# EAGLE board usbjtag (EAGLE 7.2.0)
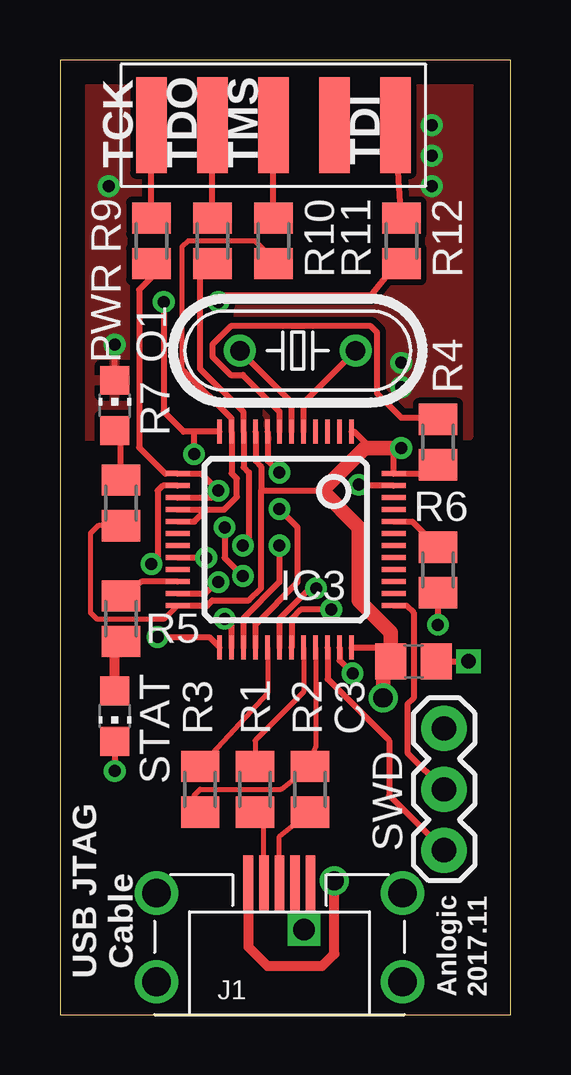
[diagram p0: board, top side]
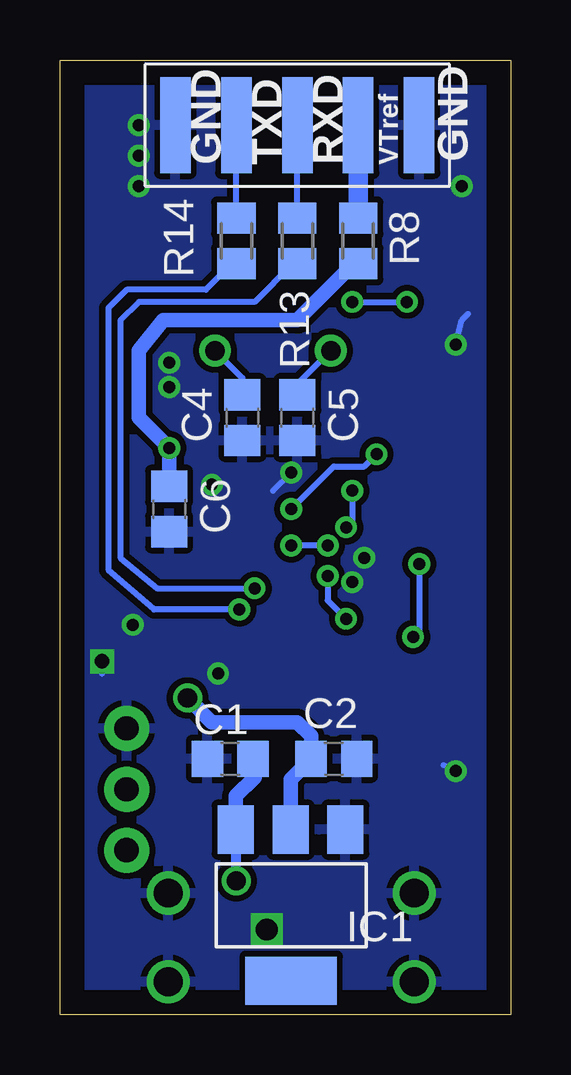
[diagram p1: board, bottom side, seen from below]

Size 18.78 x 39.8 mm. Coordinates in mm from the lower left corner, seen from the top.
Outline: 0,0 18.78,0 18.78,39.8 0,39.8 0,0
Copper layers (1*16): Top 0.035mm / dielectric 1.5mm / Bottom 0.035mm
Design rules "default": minimum track width 10mil, minimum drill 24mil, track to track 8mil, track to pad 8mil, pad to pad 8mil, via to via 8mil, smd to smd 8mil, copper to edge 40mil, drill to drill 8mil, minimum pad ring 10mil, minimum via ring 8mil, stop-mask expansion 4mil, vias tented up to drill 0mil, thermal gap 10mil
Net classes: 0 default: width 0.254 mm, clearance 0.254 mm; 2 gnd: width 0.305 mm, drill 0.559 mm, clearance 0.254 mm; 3 usbvcc: width 0.508 mm, drill 0.61 mm, clearance 0.254 mm

## Footprints (pad centres in the part's own frame; a part is rotated, then mirrored left to right if it is on the bottom)
C0805 = smd 1.3 x 1.5: 1 -0.95,0; 2 0.95,0
SIDESMT = smd 1.27 x 4: 1 -5.08,0; 2 -2.54,0; 3 0,0; 4 2.54,0; 5 5.08,0
SOT223 = smd 1.499 x 2.007: 1 -2.261,-3.15; 2 0.025,-3.15; 3 2.311,-3.15 | smd 3.81 x 2.007: 4 0,3.15
TQFP48 = smd 0.2 x 1: 1 -2.75,-4.5; 2 -2.25,-4.5; 3 -1.75,-4.5; 4 -1.25,-4.5; 5 -0.75,-4.5; 6 -0.25,-4.5; 7 0.25,-4.5; 8 0.75,-4.5; 9 1.25,-4.5; 10 1.75,-4.5; 11 2.25,-4.5; 12 2.75,-4.5; 25 2.75,4.5; 26 2.25,4.5; 27 1.75,4.5; 28 1.25,4.5; 29 0.75,4.5; 30 0.25,4.5; 31 -0.25,4.5; 32 -0.75,4.5; 33 -1.25,4.5; 34 -1.75,4.5; 35 -2.25,4.5; 36 -2.75,4.5 | smd 1 x 0.2: 13 4.5,-2.75; 14 4.5,-2.25; 15 4.5,-1.75; 16 4.5,-1.25; 17 4.5,-0.75; 18 4.5,-0.25; 19 4.5,0.25; 20 4.5,0.75; 21 4.5,1.25; 22 4.5,1.75; 23 4.5,2.25; 24 4.5,2.75; 37 -4.5,2.75; 38 -4.5,2.25; 39 -4.5,1.75; 40 -4.5,1.25; 41 -4.5,0.75; 42 -4.5,0.25; 43 -4.5,-0.25; 44 -4.5,-0.75; 45 -4.5,-1.25; 46 -4.5,-1.75; 47 -4.5,-2.25; 48 -4.5,-2.75
MICROUSB_4Z = smd 0.4 x 2.3: D+ 0,5.5; D- -0.65,5.5; GND 1.3,5.5; ID 0.65,5.5; VBUS -1.3,5.5 | drill 1.2: SHEILD1 -5.125,1.37; SHEILD2 -5.125,5.07; SHEILD3 5.125,5.07; SHEILD4 5.125,1.37
CHIP-LED0805 = smd 1.2 x 1.2: A 0,-1.05; C 0,1.05
HC49/S = drill 0.813: 1 -2.413,0; 2 2.413,0
M0805 = smd 1.3 x 1.6: 1 -0.95,0; 2 0.95,0
1X03 = drill 1.016 pad 1.88: 1 0,0; 2 2.54,0; 3 5.08,0

## Placement (x,y rotation side)
C1  10u  [C0805]  11.68,10.67 180 bottom
C2  10u  [C0805]  7.37,10.67 0 bottom
C3  104  [C0805]  14.73,14.73 0 top
C4  22p  [C0805]  11.18,24.89 270 bottom
C5  22p  [C0805]  8.89,24.89 270 bottom
C6  104  [C0805]  14.22,21.08 270 bottom
CON1  SIDESMT  [SIDESMT]  8.89,37.08 180 top
CON2  SIDESMT  [SIDESMT]  8.89,37.08 0 bottom
IC1  REG1117  [SOT223]  9.14,4.57 180 bottom
IC3  STM32F10XCXT6  [TQFP48]  9.4,19.81 180 top
J1  USB-MICROB4Z  [MICROUSB_4Z]  9.14,0 0 top
PWR  [CHIP-LED0805]  2.29,25.4 0 top
Q1  8M  [HC49/S]  9.91,27.69 0 top
R1  22  [M0805]  8.13,9.4 90 top
R2  22  [M0805]  10.41,9.4 90 top
R3  1.5k  [M0805]  5.84,9.4 270 top
R4  1.5k  [M0805]  15.75,23.88 270 top
R5  1.5k  [M0805]  2.54,16.51 270 top
R6  1.5k  [M0805]  15.75,18.54 270 top
R7  1.5k  [M0805]  2.54,21.34 270 top
R8  DNP  [M0805]  6.35,32.26 270 bottom
R9  22  [M0805]  3.81,32.26 270 top
R10  22  [M0805]  6.35,32.26 270 top
R11  22  [M0805]  8.89,32.26 270 top
R12  22  [M0805]  14.22,32.26 270 top
R13  22  [M0805]  8.89,32.26 270 bottom
R14  22  [M0805]  11.43,32.26 270 bottom
STAT  [CHIP-LED0805]  2.29,12.45 180 top
SWD  [1X03]  16,11.94 270 top

## Library data of the parts
C1-C6 R1-R14 = rcl
CON1 CON2 = con-amp
IC1 = burr-brown; MPN: REG1117; OC_FARNELL: 1097566; OC_NEWARK: 14P6981
IC3 = stm32
J1 SWD = SparkFun-Connectors
PWR STAT = led
Q1 = crystal; OC_FARNELL: 1667008; OC_NEWARK: unknown

## Nets
+3V3: C2.1 C3.1 C6.1 IC1.2 IC3.1 IC3.9 IC3.24 IC3.36 IC3.48 R4.2 R7.2 R8.2
+5V: C1.1 IC1.3 J1.VBUS
GND [gnd]: C1.2 C2.2 C3.2 C4.2 C5.2 C6.2 CON2.1 CON2.5 IC1.1 IC3.8 IC3.20 IC3.23 IC3.35 IC3.47 J1.GND J1.ID J1.SHEILD1 J1.SHEILD2 J1.SHEILD3 J1.SHEILD4 PWR.C R6.2 STAT.C SWD.1
JTAG_TCK: IC3.13 IC3.15 IC3.26 R9.2
JTAG_TDI: IC3.12 IC3.28 R12.2
JTAG_TDO: IC3.10 IC3.27 R10.2
JTAG_TMS: IC3.11 IC3.16 IC3.17 R11.2
N$1: J1.D- R1.1
N$2: J1.D+ R2.1
N$3: IC3.34 SWD.3
N$4: PWR.A R7.1
N$5: IC3.37 SWD.2
N$6: CON1.5 R9.1
N$7: CON2.3 R13.1
N$8: CON1.4 R10.1
N$9: CON2.2 R14.1
N$10: CON1.3 R11.1
N$12: CON1.1 R12.1
N$27: IC3.32 R1.2
N$28: IC3.33 R2.2 R3.2
N$29: IC3.29 R3.1
N$32: IC3.7 R4.1
N$33: IC3.22 R5.1
N$34: R5.2 STAT.A
N$35: C4.1 IC3.5 Q1.2
N$36: C5.1 IC3.6 Q1.1
N$37: IC3.44 R6.1
SPI_CS: IC3.14 IC3.25
UART_RXD: IC3.31 R14.2
UART_TXD: IC3.30 R13.2
VCCINT: CON2.4 R8.1

## Tracks (layer width: path | path; a pad name or v marks a point on that pad's centre or on a via)
+3V3  (via drill 0.5, 0.8)
  Top 0.203: R7.2 1.59,20.39 1.27,20.07 1.27,16.76 1.52,16.51 4.35,16.51 IC3.24
  Top 0.254: 12.15,15.28 IC3.36 13.2,15.31 C3.1 | 8.38,21.84 10.92,21.84 | 8.38,21.84 8.38,17.78 7.87,17.27 6.35,17.27 6.14,17.06 IC3.24 | R4.2 15.64,22.56 IC3.48 13.9,23.3 v14.22,23.62 | IC3.1 12.26,24.31 12.95,23.62 | IC3.9 8.15,23.09 8.38,22.86 8.38,21.84
  Top 0.406: 13.97,14.8 C3.1
  Top 0.61: v14.22,23.62 12.95,23.62 12.7,23.62 10.92,21.84 12.45,20.32 12.45,17.27 13.78,15.94 C3.1 13.46,14.41 v13.46,13.21
  Bottom 0.61: IC1.2 9.17,9.81 C2.1 8.32,11.62 8.89,12.19 12.45,12.19 v13.46,13.21 | R8.2 6.54,31.31 8.89,28.96 14.48,28.96 15.49,27.69 15.49,24.89 v14.22,23.62 C6.1
+5V  (via drill 0.8)
  Top 0.406: J1.VBUS 7.84,2.82 8.64,2.03 10.92,2.03 11.43,2.54 v11.43,5.59
  Bottom 0.406: v11.43,5.59 11.43,7.75 IC1.3
  Bottom 0.61: IC1.3 11.45,9.12 10.67,9.91 10.67,10.6 C1.1
GND  (via drill 0.5, 0.6, 0.9)
  Top 0.203: J1.ID 9.79,3.92 v10.16,3.56 10.44,3.84 J1.GND
  Top 0.254: IC3.20 6.08,19.06 v6.1,19.05 | IC3.23 6.06,17.56 v6.6,18.03 | STAT.C v2.29,10.16 | IC3.8 8.65,23.1 v9.14,22.61 | IC3.47 12.48,22.06 v12.45,22.1 | IC3.35 11.65,14.77 v12.19,14.22 | R6.2 v15.75,16.26 | PWR.C v2.29,27.94 | C3.2 v17.02,14.73
  Bottom 0.203: v10.16,3.56 10.16,3.3
  Bottom 0.254: 2.79,10.41 v2.29,10.16 | v9.14,22.61 9.91,21.84 | v12.45,22.1 12.19,22.1 | v2.29,27.94 2.03,28.96 1.78,29.21 | v17.02,14.73 17.02,14.22
  other vias: 2.03,34.54 15.49,34.54 14.22,26.16 14.22,27.18 15.49,37.08 15.49,35.81
  pour Bottom: -0.25,39.62 18.29,39.62 18.29,0.25 0,0.25
  pour Top: 0.51,39.62 17.02,39.62 17.02,24.13 0.51,24.13
JTAG_TCK  (via drill 0.5)
  Top 0.254: R9.2 3.81,30.73 3.3,30.23 3.3,23.65 4.39,22.56 IC3.13 5.89,22.56 v6.6,21.84 6.32,21.56 IC3.15 | v6.86,20.32 6.86,19.05 v7.62,18.29 | IC3.26 7.15,16.22 v6.86,16.51
  Bottom 0.254: v6.6,21.84 6.6,20.57 v6.86,20.32 | v7.62,18.29 7.62,17.27 v6.86,16.51
JTAG_TDI  (via drill 0.5)
  Top 0.254: R12.2 13.97,31.24 12.95,29.97 6.86,29.97 v6.6,29.72 | v4.32,29.72 4.32,25.15 5.15,24.31 5.59,24.31 | IC3.12 5.59,24.31 | IC3.28 8.15,16.28 9.91,18.03 9.91,20.32 v9.14,21.08 | v5.59,23.37 5.59,24.31
  Bottom 0.254: v6.6,29.72 v4.32,29.72 | v9.14,21.08 7.37,22.86 6.1,22.86 v5.59,23.37
JTAG_TDO  (via drill 0.5)
  Top 0.254: R10.2 5.84,30.8 5.84,26.92 7.65,25.12 IC3.10 7.65,22.83 7.87,22.61 7.87,19.81 v7.62,19.56 | v9.14,19.56 9.14,18.03 7.65,16.54 IC3.27
  Bottom 0.254: v7.62,19.56 v9.14,19.56
JTAG_TMS
  Top 0.203: 8.89,31.5 8.13,32.26 5.33,32.26 5.08,32 5.08,26.92
  Top 0.254: R11.2 8.89,31.5 | 5.08,26.92 5.21,26.8 7.15,24.86 IC3.11 7.15,22.57 7.37,22.35 7.37,21.59 6.84,21.06 6.1,21.06 | IC3.16 6.1,21.06 | IC3.17 5.6,20.56 6.1,21.06
N$1
  Top 0.203: J1.D- 8.49,7.83 R1.1
N$2
  Top 0.203: J1.D+ 9.14,7.43 R2.1
N$3
  Top 0.254: IC3.34 11.15,14 13.72,11.43 13.72,9.14 SWD.3
N$4
  Top 0.254: R7.1 2.54,24.1 PWR.A
N$5
  Top 0.254: IC3.37 14.43,17.06 14.73,16.76 14.73,13.21 14.48,12.95 14.48,10.92 SWD.2
N$6
  Top 0.254: R9.1 CON1.5
N$7
  Bottom 0.254: R13.1 CON2.3
N$8
  Top 0.254: R10.1 CON1.4 6.35,37.59
N$9
  Bottom 0.254: R14.1 CON2.2
N$10
  Top 0.254: R11.1 CON1.3
N$12
  Top 0.254: R12.1 CON1.1
N$27
  Top 0.203: IC3.32 10.15,13.45 8.13,11.43 R1.2
N$28
  Top 0.203: IC3.33 10.65,11.16 10.16,10.16 10.23,10.16 R2.2 9.21,9.4 5.84,9.4 5.59,9.14 R3.2
N$29
  Top 0.203: IC3.29 8.65,13.41 R3.1
N$32
  Top 0.254: IC3.7 9.14,25.15 7.62,26.67 7.11,26.67 6.35,27.43 6.35,27.94 7.11,28.7 12.95,28.7 13.21,28.45 13.21,25.91 14.22,24.89 15.68,24.89 R4.1
N$33
  Top 0.254: IC3.22 3.4,18.06 R5.1
N$34
  Top 0.406: STAT.A 2.29,15.31 R5.2
N$35
  Top 0.254: IC3.5 10.15,25.52 Q1.2
  Bottom 0.254: C4.1 11.18,26.54 Q1.2
N$36
  Top 0.254: IC3.6 9.65,25.53 Q1.1
  Bottom 0.254: C5.1 8.89,26.29 Q1.1
N$37
  Top 0.254: IC3.44 14.68,20.56 R6.1
SPI_CS  (via drill 0.5)
  Top 0.254: IC3.14 4.28,22.06 4.06,21.84 4.06,19.05 v3.81,18.8 | v4.06,15.75 6.21,15.75 IC3.25
  Bottom 0.254: v3.81,18.8 3.81,16 v4.06,15.75
UART_RXD  (via drill 0.5)
  Top 0.254: IC3.31 9.65,16.51 10.03,16.89 v11.3,16.89
  Bottom 0.254: R14.2 11.62,31.31 12.7,30.23 16,30.23 16.76,29.46 16.76,18.54 14.86,16.89 v11.3,16.89
UART_TXD  (via drill 0.5)
  Top 0.254: v10.67,17.78 10.41,17.78 9.14,16.51 IC3.30
  Bottom 0.254: R13.2 9.08,31.31 10.67,29.72 15.49,29.72 16.26,28.96 16.26,19.05 14.73,17.78 v10.67,17.78
VCCINT
  Bottom 0.813: CON2.4 R8.1

## Text on the board
tPlace: TCK | TDO | TMS | TDI | USB JTAG / Cable | Anlogic | 2017.11
bPlace: GND | VTref | RXD | TXD | GND